# EAGLE board SunnyBuddy (EAGLE 9.5.2)
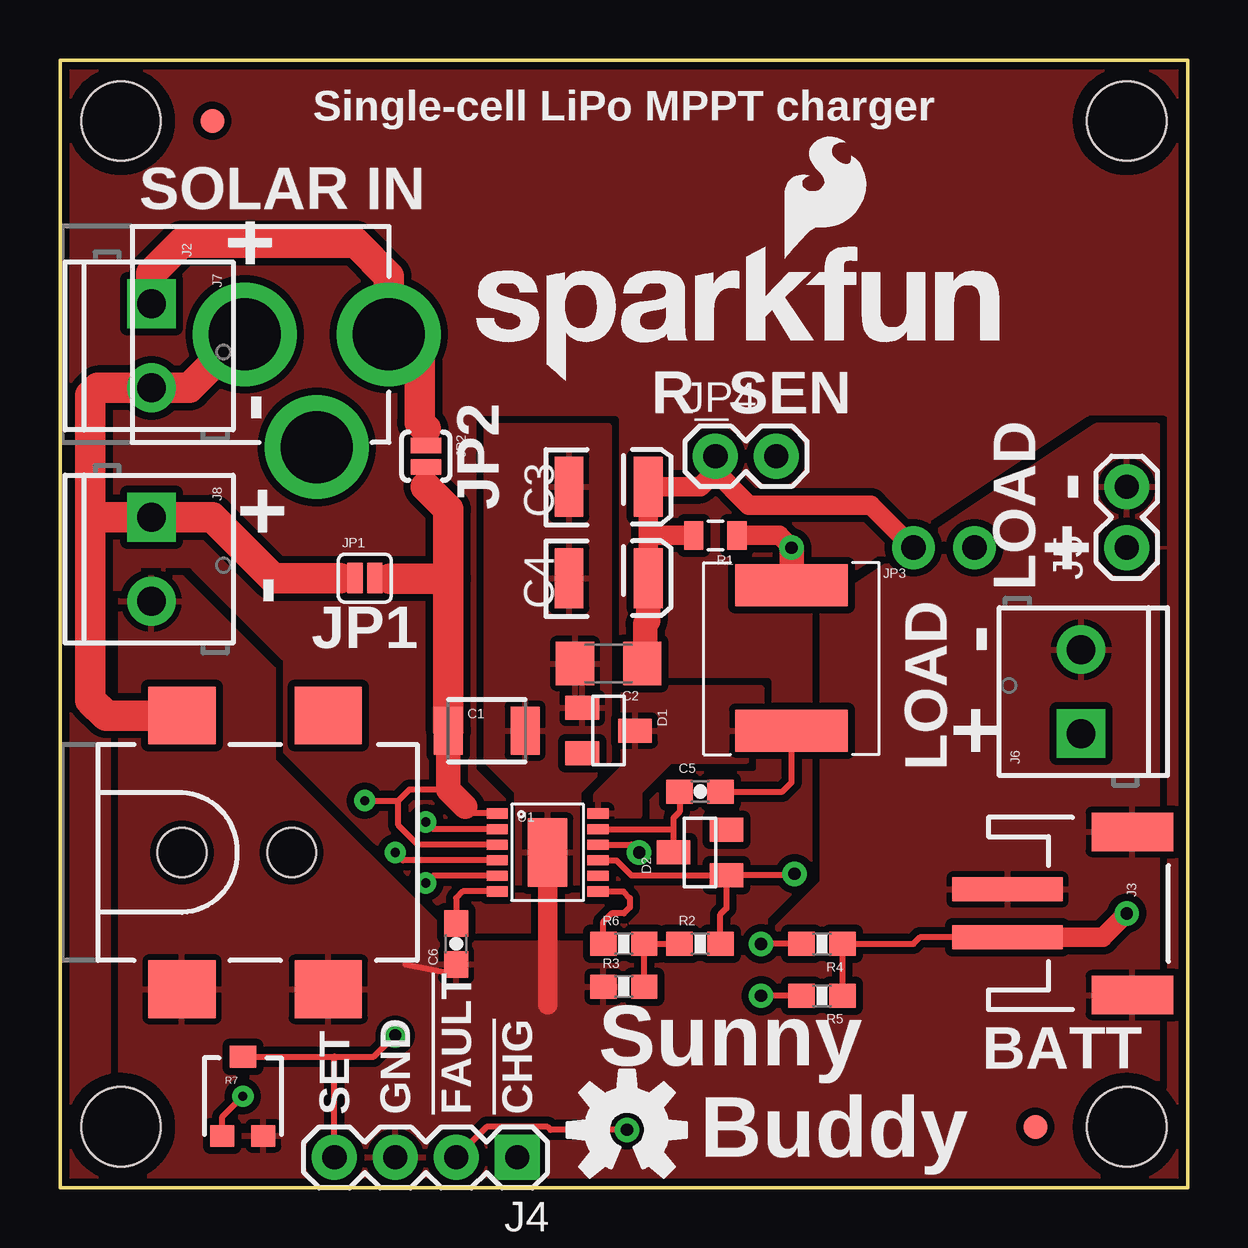
[diagram p0: board, top side]
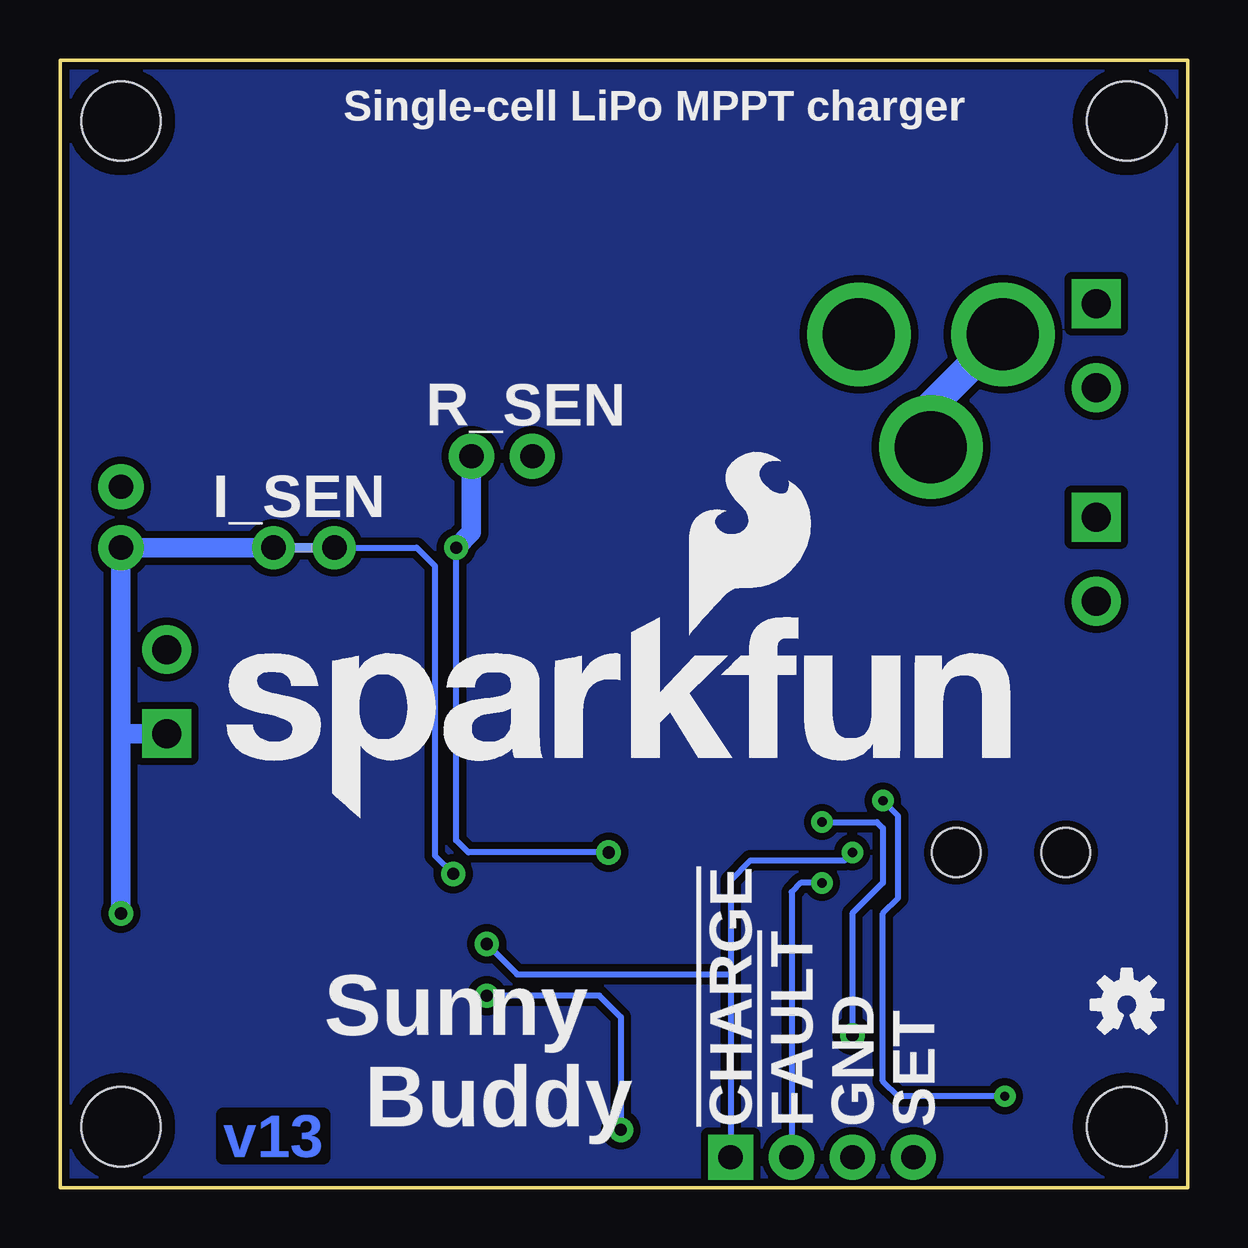
[diagram p1: board, bottom side, seen from below]

Size 46.99 x 46.99 mm. Coordinates in mm from the lower left corner, seen from the top.
Outline: 0,46.99 46.99,46.99 46.99,0 0,0 0,46.99
Copper layers (1*16): Top 0.035mm / dielectric 1.5mm / Bottom 0.035mm
Design rules "Sparkfun": minimum track width 8mil, minimum drill 20mil, track to track 8mil, track to pad 8mil, pad to pad 8mil, via to via 8mil, smd to smd 8mil, copper to edge 8mil, drill to drill 8mil, minimum pad ring 12mil, minimum via ring 10mil, stop-mask expansion 4mil, vias tented up to drill 20mil, thermal gap 10mil

## Footprints (pad centres in the part's own frame; a part is rotated, then mirrored left to right if it is on the bottom)
1210 = smd 1.2 x 2: 1 -1.6,0; 2 1.6,0
1206 = smd 1.6 x 1.8: 1 -1.4,0; 2 1.4,0
EIA3528 = smd 1.2 x 2.5: A 1.65,0; C -1.65,0
0603-CAP = smd 1.1 x 1: 1 -0.85,0; 2 0.85,0
SOT23 = smd 1 x 1.4: 1 -0.95,-1.1; 2 0.95,-1.1; 3 0,1.1
FIDUCIAL-1X2 = smd 1 x 1: 1 0,0
POWER_JACK_SMD = smd 2.8 x 2.4: GND 0,-5.7; P$4 6.1,-5.7; VIN0 0,5.7; VIN1 6.1,5.7 | hole 2.032: 0,0; 4.572,0
POWER_JACK_PTH = drill 2.997 pad 4.318: GND 0,7.7; GNDBREAK 4.7,10.7; PWR 0,13.7
JST-2-SMD = smd 1 x 4.6: 1 -1,-3.7; 2 1,-3.7 | smd 1.6 x 3.4: NC1 -3.4,1.5; NC2 3.4,1.5
1X04 = drill 1.016 pad 1.88 square: 1 0,0 | drill 1.016 pad 1.88: 2 2.54,0; 3 5.08,0; 4 7.62,0
1X02 = drill 1.016 pad 1.88: 1 0,0; 2 2.54,0
SCREWTERMINAL-3.5MM-2 = drill 1.2 pad 2.032 square: 1 0,0 | drill 1.2 pad 2.032: 2 3.5,0
SJ_2S = smd 0.635 x 1.27: 1 -0.412,0; 2 0.412,0
SJ_2S-NO = smd 0.635 x 1.27: 1 -0.45,0; 2 0.45,0
PTH-JUMPER-NC_BOTTOM_NO_SILK = drill 1.016 pad 1.778: 1 -1.27,0; 2 1.27,0 | smd 1.27 x 0.381 bottom: P$1 0,0
CR75 = smd 1.75 x 4.7: P$1 0,0; P$2 6.05,0
0805 = smd 0.8 x 1.2: 1 -0.9,0; 2 0.9,0
0603-RES = smd 1.1 x 1: 1 -0.85,0; 2 0.85,0
TRIMPOT-3MM = smd 1 x 0.9: 1 -0.85,-1.65; 3 0.85,-1.65 | smd 1.1 x 0.9: 2 0,1.65
STAND-OFF = hole 3.302: 0,0
MSOP-12_GND = smd 0.889 x 0.42: 1 -2.1,1.625; 2 -2.1,0.975; 3 -2.1,0.325; 4 -2.1,-0.325; 5 -2.1,-0.975; 6 -2.1,-1.625; 7 2.1,-1.625; 8 2.1,-0.975; 9 2.1,-0.325; 10 2.1,0.325; 11 2.1,0.975; 12 2.1,1.625 | smd 1.651 x 2.845: 13 0,0

## Placement (x,y rotation side)
C1  10uF  [1210]  17.78,19.05 0 top
C2  10uF  [1206]  22.86,21.84 180 top
C3  47uF  [EIA3528]  22.86,29.21 0 top
C4  47uF  [EIA3528]  22.86,25.4 0 top
C5  1.0uF  [0603-CAP]  26.67,16.51 0 top
C6  1.0uF  [0603-CAP]  16.51,10.16 90 top
D1  ZLLS500  [SOT23]  22.86,19.05 270 top
D2  ZLLS500  [SOT23]  26.67,13.97 90 top
FID1  FIDUCIAL1X2  [FIDUCIAL-1X2]  6.35,44.45 0 top
FID2  FIDUCIAL1X2  [FIDUCIAL-1X2]  40.64,2.54 0 top
FRAME1  FRAME-LETTER  [CREATIVE_COMMONS]  46.99,-26.67 0 top  (outside the outline)
J1  5.5x2.1mm Barrel  [POWER_JACK_SMD]  5.08,13.97 0 top
J2  POWER_JACKPTH  [POWER_JACK_PTH]  0,35.56 270 top
J3  [JST-2-SMD]  43.18,11.43 270 top
J4  [1X04]  19.05,1.27 180 top
J5  M02PTH  [1X02]  44.45,26.67 90 top
J6  M023.5MM  [SCREWTERMINAL-3.5MM-2]  42.55,18.92 90 top
J7  M023.5MM  [SCREWTERMINAL-3.5MM-2]  3.81,36.83 270 top
J8  M023.5MM  [SCREWTERMINAL-3.5MM-2]  3.81,27.94 270 top
JP1  [SJ_2S]  12.7,25.4 0 top
JP2  [SJ_2S-NO]  15.24,30.48 270 top
JP3  JUMPER-PTH-2-NC  [PTH-JUMPER-NC_BOTTOM_NO_SILK]  36.83,26.67 0 top
JP4  R_SEN  [1X02]  27.3,30.48 0 top
L1  68uH  [CR75]  30.48,19.05 90 top
LOGO1  SFE_LOGO_NAME_FLAME.2_INCH  [SFE_LOGO_NAME_FLAME_.2]  16.64,33.53 0 top
LOGO2  OSHW-LOGOM  [OSHW-LOGO-M]  23.62,2.41 0 top
LOGO3  OSHW-LOGOS  [OSHW-LOGO-S]  2.54,7.62 0 bottom
LOGO4  SFE_LOGO_NAME_FLAME.3_INCH  [SFE_LOGO_NAME_FLAME_.3]  40.64,15.24 0 bottom
R1  0.22  [0805]  27.3,27.18 180 top
R2  47k  [0603-RES]  26.67,10.16 0 top
R3  220k  [0603-RES]  23.5,8.38 0 top
R4  10K  [0603-RES]  31.75,10.16 180 top
R5  10K  [0603-RES]  31.75,8 180 top
R6  220k  [0603-RES]  23.5,10.16 0 top
R7  10k  [TRIMPOT-3MM]  7.62,3.81 0 top
STANDOFF1  STAND-OFF  [STAND-OFF]  2.54,2.54 0 top
STANDOFF2  STAND-OFF  [STAND-OFF]  2.54,44.45 0 top
STANDOFF3  STAND-OFF  [STAND-OFF]  44.45,44.45 0 top
STANDOFF4  STAND-OFF  [STAND-OFF]  44.45,2.54 0 top
U1  LT3652  [MSOP-12_GND]  20.32,13.97 0 top

## Library data of the parts
C1 = SparkFun-Capacitors; PROD_ID: CAP-09824
C2 = SparkFun-Capacitors; PROD_ID: CAP-10057
C3 C4 = SparkFun-Capacitors; PROD_ID: CAP-08310
C5 C6 = SparkFun-Capacitors; PROD_ID: CAP-00868
D1 D2 = SparkFun-DiscreteSemi; PROD_ID: DIO-08411
FID1 FID2 FRAME1 LOGO1-LOGO4 = SparkFun-Aesthetics
J1 = SparkFun-Connectors; PROD_ID: CONN-08106
J2 J4-J8 JP4 = SparkFun-Connectors
J3 = SparkFun-Connectors; PROD_ID: CONN-08352
JP1-JP3 = SparkFun-Passives
L1 = SparkFun-Passives; PROD_ID: NDUC-09739
R1 = SparkFun-Resistors; PROD_ID: RES-09883
R2 = SparkFun-Resistors; PROD_ID: RES-07871
R3 R6 = SparkFun-Resistors; PROD_ID: RES-08969
R4 R5 = SparkFun-Resistors; PROD_ID: RES-00824
R7 = SparkFun-Electromechanical; PROD_ID: RES-09285
STANDOFF1-STANDOFF4 = SparkFun-Electromechanical
U1 = SparkFun-PowerIC

## Nets
!CHRG: J4.1 R4.2 U1.4
!FAULT: J4.2 R5.2 U1.5
BOOST: C5.1 D2.3 U1.11
FB: R2.1 R3.2 R6.2
GND: C1.2 C2.2 C3.C C4.C C6.1 D1.1 J1.GND J1.P$4 J3.1 J3.NC1 J3.NC2 J4.3 J5.2 J6.2 J8.2 R3.1 R7.3 U1.13
N$3: R6.1 U1.7
N$4: C2.1 C3.A C4.A D2.1 JP3.1 JP4.1 R1.2 R2.2 U1.9
N$8: J1.VIN0 J2.GND J2.GNDBREAK J7.2 J8.1 JP1.1
NTC: U1.8
SENSE: JP4.2 L1.P$2 R1.1 U1.10
SET: J4.4 R7.2 U1.2
SFSASDF: J2.PWR J7.1 JP2.1
SW: C5.2 D1.3 L1.P$1 U1.12
TIMER: C6.2 U1.6
V_BATT: J3.2 J5.1 J6.1 JP3.2 R4.1 R5.1
VIN: C1.1 JP1.2 JP2.2 R7.1 U1.1 U1.3

## Tracks (layer width: path | path; a pad name or v marks a point on that pad's centre or on a via)
!CHRG  (via drill 0.38, 0.51)
  Top 0.254: R4.2 v29.21,10.16 | U1.4 14.29,13.64 v13.97,13.97
  Bottom 0.254: 19.05,8.89 19.05,12.81 U1.4 14.29,13.64 v13.97,13.97 | 19.05,8.89 J4.1 | 19.05,8.89 27.94,8.89 v29.21,10.16
!FAULT  (via drill 0.38, 0.51)
  Top 0.254: v23.62,2.41 20.45,2.41 20.32,2.54 17.78,2.54 J4.2 | R5.2 v29.21,8 | U1.5 15.54,12.99 v15.24,12.7
  Bottom 0.254: J4.2 16.51,12.32 16.13,12.7 v15.24,12.7 | v23.62,2.41 23.62,7.11 24.51,8 v29.21,8
BOOST
  Top 0.254: D2.3 25.57,14.86 | 25.57,14.86 25.57,15.41 25.82,15.66 C5.1 | U1.11 25.48,14.95 25.57,14.86
FB
  Top 0.254: R2.1 R6.2 R3.2
GND
  Top 0.254: 14.39,9.31 16.51,8.89
  Top 0.813: U1.13 20.32,7.62
  pour Top (isolate 0.305): 43.18,31.75 31.75,24.13 31.75,12.7 29.21,10.16 16.51,10.16 8.89,17.78 8.89,21.59 5.08,25.4 2.54,25.4 2.54,0 45.72,0 45.72,31.75
  pour Top (isolate 0.305): 22.86,31.75 22.86,17.78 21.59,16.51 21.59,12.7 19.05,12.7 19.05,16.51 17.78,17.78 17.78,31.75
N$1
  pour Top (isolate 0.305, rank 2, no thermals): 0,46.99 46.99,46.99 46.99,0 0,0
N$2
  pour Bottom (isolate 0.305, rank 2, no thermals): 0,46.99 46.99,46.99 46.99,0 0,0
N$3
  Top 0.254: U1.7 23.47,12.35 23.75,12.06 23.75,11.68 23.5,11.43 22.99,11.43 22.64,11.09 R6.1
N$4  (via drill 0.51)
  Top 0.254: U1.9 23.18,13.64 23.81,13.02 D2.1 | 24.13,21.97 C2.1 | D2.1 27.77,11.64 27.52,11.39 R2.2 | v30.61,13.08 30.55,13.02 D2.1
  Top 0.813: C4.A 24.51,27.18 | 24.51,27.18 C3.A 26.67,29.21 27.3,29.84 | 27.3,29.84 JP4.1 | R1.2 24.51,27.18 | JP3.1 33.78,28.45 28.7,28.45 27.3,29.84
  Top 1.016: C4.A 24.51,23.62 24.38,23.5 24.38,21.97 C2.1
  Bottom 0.254: JP3.1 32.13,26.67 31.37,25.91 31.37,13.84 v30.61,13.08
N$8
  Top 0.254: J2.GND 7.62,35.56 | 11.68,25.4 JP1.1
  Top 1.27: 7.62,35.56 5.39,33.33 J7.2 1.58,33.33 1.27,33.02 1.27,27.94 | 1.27,27.94 1.27,20.32 1.92,19.67 J1.VIN0 | 11.68,25.4 8.89,25.4 6.35,27.94 J8.1 1.27,27.94
  Bottom 1.27: J2.GNDBREAK 10.7,32.56 J2.GND
SENSE  (via drill 0.51)
  Top 0.254: U1.10 23.8,14.29 v24.13,13.97
  Top 0.813: R1.1 29.97,27.18 v30.48,26.67
  Top 1.016: v30.48,26.67 L1.P$2
  Bottom 0.254: v24.13,13.97 29.97,13.97 30.48,14.48 v30.48,26.67
  Bottom 0.813: JP4.2 29.84,27.3 v30.48,26.67
SET  (via drill 0.38, 0.51)
  Top 0.254: R7.2 11.43,5.46 | 11.43,5.46 13.08,5.46 v13.97,6.35 | U1.2 15.54,14.95 v15.24,15.24 | J4.4 11.43,5.46
  Bottom 0.254: v15.24,15.24 12.95,15.24 12.7,14.99 12.7,12.7 13.97,11.43 v13.97,6.35
SFSASDF
  Top 0.254: JP2.1 15.24,31.62
  Top 1.27: J7.1 3.81,38.1 5.08,39.37 12.32,39.37 13.7,37.99 J2.PWR 14.99,34.42 14.99,31.88 15.24,31.62
SW
  Top 0.254: C5.2 30.1,16.51 30.48,16.89 L1.P$1
  pour Top (isolate 0.305): 23.5,20.83 29.21,20.83 29.21,18.41 28.57,17.78 25.4,17.78 24.13,16.51 24.13,15.49 22.35,15.49 22.35,16.38 23.5,17.53
TIMER
  Top 0.254: U1.6 16.79,12.35 16.51,12.06 C6.2
V_BATT  (via drill 0.51)
  Top 0.254: R5.1 R4.1 35.56,10.16 35.83,10.43 J3.2
  Top 0.813: J3.2 43.45,10.43 v44.45,11.43
  Bottom 0.813: v44.45,11.43 44.45,19.05 | 44.45,19.05 J5.1 JP3.2 | J6.1 44.32,18.92 44.45,19.05
VIN  (via drill 0.38)
  Top 0.254: 13.73,25.39 13.72,25.4 JP1.2 | JP2.2 15.24,29.21 | U1.1 17.17,15.6 16.89,15.88 | U1.3 14.91,14.29 14.1,15.11 14.1,16.13 | 14.1,16.13 14.55,16.59 16.18,16.59 | R7.1 6.77,2.96 v7.62,3.81 | v12.7,16.13 14.1,16.13
  Top 1.016: C1.1 16.18,16.59 16.89,15.88
  Top 1.27: C1.1 16.18,25.39 | 16.18,25.39 13.73,25.39 | 16.18,25.39 16.18,28.27 15.24,29.21
  Bottom 0.254: v7.62,3.81 12.06,3.81 12.7,4.45 12.7,11.43 12.06,12.06 12.06,15.49 v12.7,16.13

## Text on the board
Bottom: v13
tPlace: Single-cell LiPo MPPT charger | SOLAR IN | + | - | R_SEN | JP2 | - | + | + | - | LOAD | - | JP1 | + | LOAD | BATT | Sunny | SET | GND | !FAULT | !CHG | Buddy
bPlace: Single-cell LiPo MPPT charger | R_SEN | I_SEN | Sunny | SET | GND | !FAULT | !CHARGE | Buddy
tDocu: M. Hord